# EAGLE board AtmegaRFM69 (EAGLE 6.5.0)

Size 100 x 80 mm. Coordinates in mm from the lower left corner, seen from the top.
Outline: 0,0 100,0 100,80 0,80 0,0
Copper layers (1*16): Top 0.035mm / dielectric 1.5mm / Bottom 0.035mm
Design rules "default": minimum track width 10mil, minimum drill 24mil, track to track 8mil, track to pad 8mil, pad to pad 8mil, via to via 8mil, smd to smd 8mil, copper to edge 40mil, drill to drill 8mil, minimum pad ring 10mil, minimum via ring 8mil, stop-mask expansion 4mil, vias tented up to drill 0mil, thermal gap 10mil
Net classes: 0 default: width 0.203 mm, drill 0.6 mm, clearance 0.203 mm; 1 power: width 0.305 mm, drill 0.6 mm, clearance 0.254 mm; 2 gnd: width 0.254 mm, drill 0.6 mm, clearance 0.254 mm

## Footprints (pad centres in the part's own frame; a part is rotated, then mirrored left to right if it is on the bottom)
PAD-01 = drill 1.321 pad 2.54 octagon: 1 0,0
C0603 = smd 1.1 x 1: 1 -0.85,0; 2 0.85,0
2X3 = drill 1.016 pad 1.88 octagon: 1 0,0; 2 0,2.54; 3 2.54,0; 4 2.54,2.54; 5 5.08,0; 6 5.08,2.54
SMA-EDGE = smd 1.524 x 4.064: GND@0 0,0; GND@1 5.08,0; SIG 2.54,0 | smd 1.524 x 4.064 bottom: GND@2 0,0; GND@3 5.08,0
FTDI_BASIC = drill 1.016 pad 1.88: CTS 10.16,0; DTR 0,0; GND 12.7,0; RXI 2.54,0; TXO 5.08,0; VCC 7.62,0
HC49UP = smd 5.334 x 1.93: 1 -4.826,0; 2 4.826,0
R0603 = smd 1 x 1.1: 1 -0.85,0; 2 0.85,0
MLF32 = smd 0.7 x 0.3: 1 -2.35,1.75; 2 -2.35,1.25; 3 -2.35,0.75; 4 -2.35,0.25; 5 -2.35,-0.25; 6 -2.35,-0.75; 7 -2.35,-1.25; 8 -2.35,-1.75; 17 2.35,-1.75; 18 2.35,-1.25; 19 2.35,-0.75; 20 2.35,-0.25; 21 2.35,0.25; 22 2.35,0.75; 23 2.35,1.25; 24 2.35,1.75 | smd 0.3 x 0.7: 9 -1.75,-2.35; 10 -1.25,-2.35; 11 -0.75,-2.35; 12 -0.25,-2.35; 13 0.25,-2.35; 14 0.75,-2.35; 15 1.25,-2.35; 16 1.75,-2.35; 25 1.75,2.35; 26 1.25,2.35; 27 0.75,2.35; 28 0.25,2.35; 29 -0.25,2.35; 30 -0.75,2.35; 31 -1.25,2.35; 32 -1.75,2.35
TQFP32-08 = smd 1.27 x 0.559: 1 -4.293,2.8; 2 -4.293,2; 3 -4.293,1.2; 4 -4.293,0.4; 5 -4.293,-0.4; 6 -4.293,-1.2; 7 -4.293,-2; 8 -4.293,-2.8; 17 4.293,-2.8; 18 4.293,-2; 19 4.293,-1.2; 20 4.293,-0.4; 21 4.293,0.4; 22 4.293,1.2; 23 4.293,2; 24 4.293,2.8 | smd 0.559 x 1.27: 9 -2.8,-4.293; 10 -2,-4.293; 11 -1.2,-4.293; 12 -0.4,-4.293; 13 0.4,-4.293; 14 1.2,-4.293; 15 2,-4.293; 16 2.8,-4.293; 25 2.8,4.293; 26 2,4.293; 27 1.2,4.293; 28 0.4,4.293; 29 -0.4,4.293; 30 -1.2,4.293; 31 -2,4.293; 32 -2.8,4.293
RFM12B = smd 2.54 x 1.27: ANT 8,-6; FFS -8,2; GND 8,-2; IRQ -8,4; P$8 -8,0; P$9 -8,-2; P$10 -8,-4; P$12 -8,-6; P$16 8,0; SCK 8,4; SDI 8,2; SDO -8,6; SEL 8,6; VDD 8,-4

## Placement (x,y rotation side)
ANT1  [PAD-01]  39.37,13.97 0 top
C3  0.1uF  [C0603]  58.42,50.8 90 top
C6  0.1uF  [C0603]  39.37,48.26 0 top
C7  22pF  [C0603]  26.67,54.61 270 top
C8  0.1uF  [C0603]  39.37,53.34 0 top
C9  100nF  [C0603]  39.37,67.31 90 top
C10  100nF  [C0603]  39.37,26.67 90 top
C11  22pF  [C0603]  26.67,44.45 90 top
C16  20pF  [C0603]  40.64,19.05 180 top
C19  20pF  [C0603]  45.72,19.05 0 top
ISP  2x3  [2X3]  60.96,39.37 270 top
J$1  SMA_EDGE  [SMA-EDGE]  44.45,13.97 0 top
JP1  FTDI  [FTDI_BASIC]  44.45,68.58 0 top
Q1  16Mhz  [HC49UP]  33.02,49.53 90 top
R5  100K  [R0603]  39.37,39.37 90 top
R32  10K  [R0603]  39.37,62.23 270 top
U1_MLF  ATMEGA168MLF  [MLF32]  49.53,50.8 0 top
U1_TQFP  ATMEGA328P  [TQFP32-08]  49.53,50.8 0 top
U$14  RFM12B  [RFM12B]  49.53,31.75 270 top

## Library data of the parts
ANT1 = discrete
C3 C9 C10 C16 C19 R5 = rcl
C6-C8 C11 = resistor
ISP JP1 = SparkFun
J$1 = SparkFun-Connectors
Q1 = adafruit; OC_FARNELL: unknown; OC_NEWARK: unknown
R32 = adafruit
U1_MLF = SparkFun-DigitalIC
U1_TQFP = SparkFun-DigitalIC; PROD_ID: IC-09069
U$14 = JeeParts

## Nets
3.3V: C3.1 C6.1 C10.1 ISP.2 R5.2 R32.2 U1_MLF.4 U1_MLF.6 U1_MLF.18 U1_TQFP.4 U1_TQFP.6 U1_TQFP.18 U$14.VDD
+5V [power]: JP1.VCC
A6: U1_MLF.19 U1_TQFP.19
A7: U1_MLF.22 U1_TQFP.22
ADC0: U1_MLF.23 U1_TQFP.23
ADC1: U1_MLF.24 U1_TQFP.24
ADC2: U1_MLF.25 U1_TQFP.25
ADC3: U1_MLF.26 U1_TQFP.26
ADC4: U1_MLF.27 U1_TQFP.27
ADC5: U1_MLF.28 U1_TQFP.28
D0/RX: JP1.TXO U1_MLF.30 U1_TQFP.30
D1/TX: JP1.RXI U1_MLF.31 U1_TQFP.31
D2: U1_MLF.32 U1_TQFP.32 U$14.IRQ
D3: U1_MLF.1 U1_TQFP.1
D4: U1_MLF.2 U1_TQFP.2
D5: U1_MLF.9 U1_TQFP.9
D6: U1_MLF.10 U1_TQFP.10
D7: U1_MLF.11 U1_TQFP.11
D8: U1_MLF.12 U1_TQFP.12
D9: U1_MLF.13 U1_TQFP.13
D10: R5.1 U1_MLF.14 U1_TQFP.14 U$14.SEL
D11/MOSI: ISP.4 U1_MLF.15 U1_TQFP.15 U$14.SDI
D12/MISO: ISP.1 U1_MLF.16 U1_TQFP.16 U$14.SDO
D13/SCK: ISP.3 U1_MLF.17 U1_TQFP.17 U$14.SCK
DIG1: C16.1 C19.1 U$14.ANT
GND [gnd]: C3.2 C6.2 C7.2 C8.2 C10.2 C11.2 ISP.6 J$1.GND@0 J$1.GND@1 J$1.GND@2 J$1.GND@3 JP1.GND U1_MLF.3 U1_MLF.5 U1_MLF.21 U1_TQFP.3 U1_TQFP.5 U1_TQFP.21 U$14.GND U$14.P$12
N$2: C7.1 Q1.2 U1_MLF.7 U1_TQFP.7
N$9: C11.1 Q1.1 U1_MLF.8 U1_TQFP.8
N$11: ANT1.1 C16.2
N$19: JP1.CTS
N$20: C8.1 U1_MLF.20 U1_TQFP.20
N$23: C9.2 JP1.DTR
N$24: C19.2 J$1.SIG
RESET: C9.1 ISP.5 R32.1 U1_MLF.29 U1_TQFP.29

## Tracks (layer width: path | path; a pad name or v marks a point on that pad's centre or on a via)
3.3V  (12 unrouted)
A6  (1 unrouted)
A7  (1 unrouted)
ADC0  (1 unrouted)
ADC1  (1 unrouted)
ADC2  (1 unrouted)
ADC3  (1 unrouted)
ADC4  (1 unrouted)
ADC5  (1 unrouted)
D0/RX  (2 unrouted)
D1/TX  (2 unrouted)
D2  (2 unrouted)
D3  (1 unrouted)
D4  (1 unrouted)
D5  (1 unrouted)
D6  (1 unrouted)
D7  (1 unrouted)
D8  (1 unrouted)
D9  (1 unrouted)
D10  (3 unrouted)
D11/MOSI  (3 unrouted)
D12/MISO  (3 unrouted)
D13/SCK  (3 unrouted)
DIG1  (2 unrouted)
GND  (19 unrouted)
N$2  (3 unrouted)
N$9  (3 unrouted)
N$11  (1 unrouted)
N$20  (2 unrouted)
N$23  (1 unrouted)
N$24  (1 unrouted)
RESET  (4 unrouted)